# Altium PCB ankle_pcb.PcbDoc
Units mm, origin at the board's own origin, x right, y up, seen from the top; angles counter-clockwise.
Board outline 58.67 x 55.87 mm, 2 copper layers (Top Layer, Bottom Layer); 3 components, 0 nets, 16 pads, 0 vias.
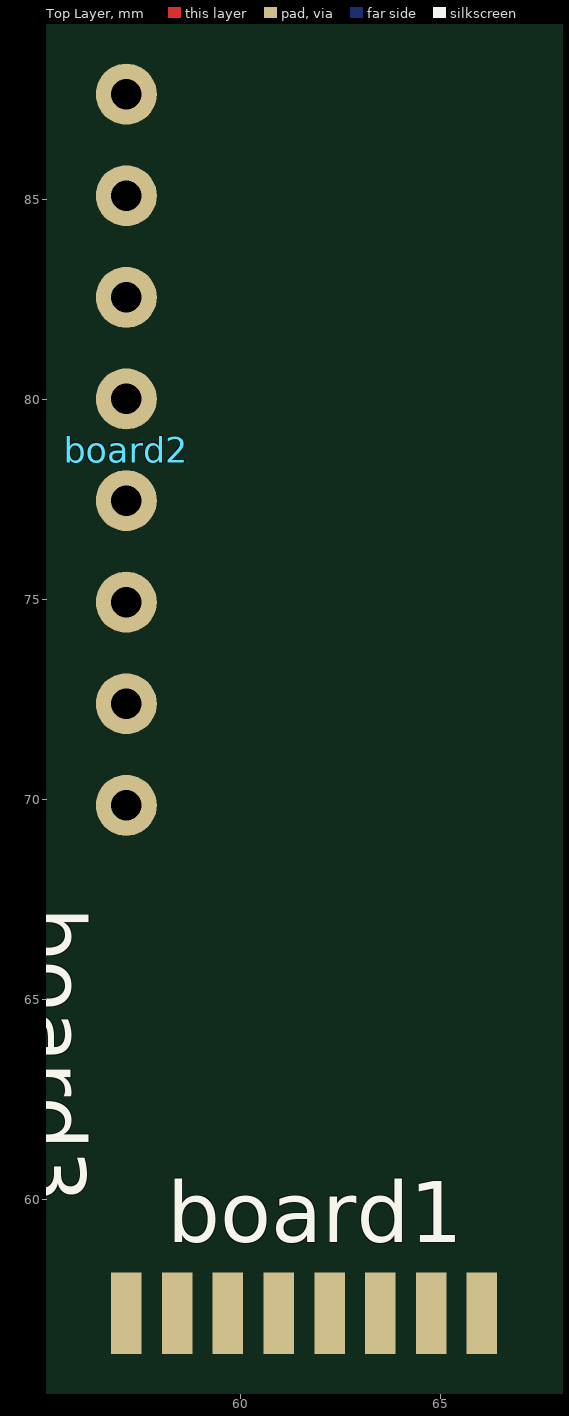
[diagram p0: Top Layer view]
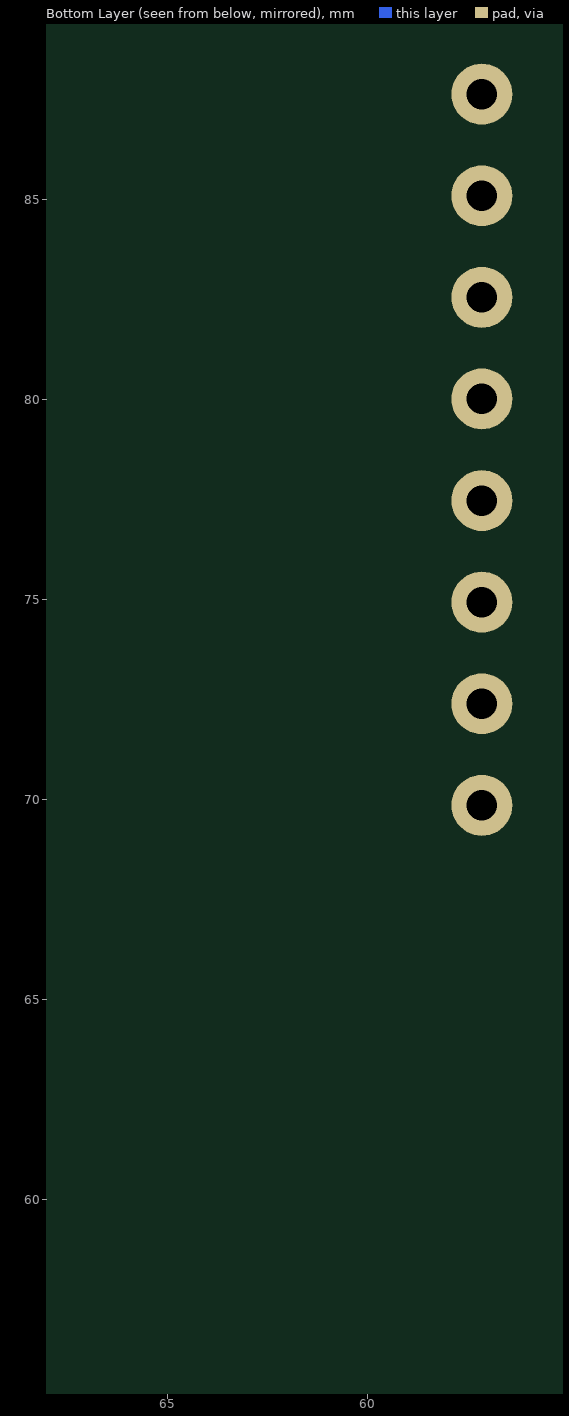
[diagram p1: Bottom Layer view, seen from below]

## Layer stack, top to bottom
Top Solder: solder mask 0.0102, Solder Resist, Dk 3.5
Top Layer: signal copper 0.0356
Dielectric 1: dielectric 0.32, FR-4, Dk 4.8
Bottom Layer: signal copper 0.0356
Bottom Solder: solder mask 0.0102, Solder Resist, Dk 3.5

## Board outline
11.176,93.392 11.176,38.1 55.372,38.1 55.372,53.34 69.85,53.34 69.85,93.968

## Design rules (kind name [scope] priority, off if disabled: settings)
Clearance [All] p1: gap=0.254 ignorepadtopadclearanceinfootprint=FALSE
PolygonConnect [All] p1: connectstyle=Relief reliefconductorwidth=0.254 reliefentries=4 polygonreliefangle="90 Angle" airgapwidth=0.254
RoutingVias [All] p1: holewidth=0.711 width=1.27 viastyle="Through Hole" minholewidth=0.711 minwidth=1.27 maxholewidth=0.711 maxwidth=1.27
SolderMaskExpansion [All] p1: expansion=0.102 istentingtop=FALSE
Width [All] p1: maxlimit=0.254 minlimit=0.254 preferedwidth=0.254
30 further rules are at their usual default settings.

## Components (designator, comment, footprint, x,y, rotation, side; value= is the part's Value field where it differs from the comment)
board1 "NRF24" NRF24 61.595,57.531 r180 top
board2 "MPUU6050" MPU6050 55.88,78.74 r270 top
board3 "Adafruit_Feather_STM32F405" ADAFRUIT_FEATHER_STM32F405 49.276,45.72 r90 top

## Footprints (in the part's own frame and the unit in brackets; to place one, negate y for a bottom-side part, rotate by r counter-clockwise, add the part's x,y. Pads: shape width x height; smd on the part's side, far side on the other; paste and mask are expansions set on the pad)
ADAFRUIT_FEATHER_STM32F405 [mm]
  body extent -6,-4.56 45.97,18.54, height 8.89
MPU6050 [mil]
  round 60 hole 30: 1(-350,50) 2(-250,50) 3(-150,50) 4(-50,50) 5(50,50) 6(150,50) 7(250,50) 8(350,50)
  body extent -413,0 413,630, height 240
NRF24 [mil]
  rect 30x80 smd: 1(-175,15) 2(-125,15) 3(-75,15) 4(-25,15) 5(25,15) 6(75,15) 7(125,15) 8(175,15)
  body extent -236,0 236,709, height 89

## Nets (pads, with @x,y where several pads share a name; then routed paths per layer and width w, separated by ;. In a path a pad name is that pad's centre, name@x,y a point inside that pad or via, vN(x,y) a via of type N, cw(c..) or ccw(c..) an arc to the next point about the centre after c; other vN are vias at no path point)
pads on no net: board1.1 board1.2 board1.3 board1.4 board1.5 board1.6 board1.7 board1.8 board2.1 board2.2 board2.3 board2.4 board2.5 board2.6 board2.7 board2.8